# EAGLE board watch2 (EAGLE 5.06)

Size 161.29 x 99.06 mm. Coordinates in mm from the lower left corner, seen from the top.
Outline: 0,99.06 161.29,99.06 161.29,0 0,0 0,99.06
Outline: circle at 52.07,46.99 radius 24.13
Outline: circle at 52.07,46.99 radius 22.23
Outline: circle at 52.11,46.92 radius 20.32
Copper layers (1*16): Top 0.035mm / dielectric 1.5mm / Bottom 0.035mm
Design rules "default": minimum track width 10mil, minimum drill 24mil, track to track 8mil, track to pad 8mil, pad to pad 8mil, via to via 8mil, smd to smd 8mil, copper to edge 40mil, drill to drill 8mil, minimum pad ring 10mil, minimum via ring 8mil, stop-mask expansion 4mil, vias tented up to drill 0mil, thermal gap 10mil
Net classes: 0 default: width 0.356 mm

## Footprints (pad centres in the part's own frame; a part is rotated, then mirrored left to right if it is on the bottom)
0805 = smd 0.8 x 1.2: 1 -0.9,0; 2 0.9,0
HC49UP = smd 5.334 x 1.93: 1 -4.826,0; 2 4.826,0
TQFP32-08 = smd 1.27 x 0.559: 1 -4.293,2.8; 2 -4.293,2; 3 -4.293,1.2; 4 -4.293,0.4; 5 -4.293,-0.4; 6 -4.293,-1.2; 7 -4.293,-2; 8 -4.293,-2.8; 17 4.293,-2.8; 18 4.293,-2; 19 4.293,-1.2; 20 4.293,-0.4; 21 4.293,0.4; 22 4.293,1.2; 23 4.293,2; 24 4.293,2.8 | smd 0.559 x 1.27: 9 -2.8,-4.293; 10 -2,-4.293; 11 -1.2,-4.293; 12 -0.4,-4.293; 13 0.4,-4.293; 14 1.2,-4.293; 15 2,-4.293; 16 2.8,-4.293; 25 2.8,4.293; 26 2,4.293; 27 1.2,4.293; 28 0.4,4.293; 29 -0.4,4.293; 30 -1.2,4.293; 31 -2,4.293; 32 -2.8,4.293
2X3 = drill 1.016 pad 1.88 octagon: 1 0,0; 2 0,2.54; 3 2.54,0; 4 2.54,2.54; 5 5.08,0; 6 5.08,2.54
MOLEX-1X6-RA_LOCK = drill 1.016 pad 1.88 square: 1 0,0.127 | drill 1.016 pad 1.88 round: 2 2.54,-0.127; 3 5.08,0.127; 4 7.62,-0.127; 5 10.16,0.127; 6 12.7,-0.127
1X01 = drill 1.016 octagon: 1 0,0
LED-1206 = smd 1.2 x 1.4: A -1.5,0; C 1.5,0
TACTILE_SWITCH_SMD = smd 1.524 x 0.762: 1 -3.302,2.286; 2 3.302,2.286; 3 -3.302,-2.286; 4 3.302,-2.286
BUZZER-CCV = smd 3.2 x 2.5: + 4,0; - -4,0 | hole 0.8: -3.9,-2.25; 2.25,3.9
AGAIN = smd 5.08 x 6.35: + -15.24,-0.635; - 15.24,-0.635

## Placement (x,y rotation side)
C1  15pF  [0805]  45.72,67.31 0 top
C2  15pF  [0805]  57.15,67.31 0 top
C3  10uF  [0805]  59.69,36.83 0 top
C4  100nF  [0805]  59.69,39.37 0 top
C5  1.0uF  [0805]  55.88,39.37 180 top
C6  100nF  [0805]  52.07,39.37 0 top
CRYSTAL  16Mhz  [HC49UP]  52.07,62.23 0 bottom
IC1  [TQFP32-08]  52.07,46.99 0 bottom
ICSP  AVR_SPI_PRG_6PTH  [2X3]  50.8,33.02 0 top
JP1  [MOLEX-1X6-RA_LOCK]  45.72,30.48 0 top
JP2  [1X01]  68.58,52.07 0 top
JP3  [1X01]  60.96,33.02 0 top
JP4  [1X01]  43.18,33.02 0 top
JP5  [1X01]  35.56,52.07 0 top
LED1  [LED-1206]  52.07,69.22 0 top
LED2  [LED-1206]  63.14,66.27 330 top
LED3  [LED-1206]  71.33,58.12 300 top
LED4  [LED-1206]  72.42,47 270 top
LED5  [LED-1206]  71.34,35.92 240 top
LED6  [LED-1206]  62.27,29.32 210 top
LED7  [LED-1206]  52.07,24.77 180 top
LED8  [LED-1206]  40.91,27.75 150 top
LED9  [LED-1206]  32.81,35.87 120 top
LED10  [LED-1206]  29.84,46.99 90 top
LED11  [LED-1206]  32.85,58.14 60 top
LED12  [LED-1206]  40.95,66.24 30 top
LED13  [LED-1206]  52.07,67.24 0 top
LED14  [LED-1206]  62.18,64.6 330 top
LED15  [LED-1206]  69.65,57.14 300 top
LED16  [LED-1206]  74.29,47 270 top
LED17  [LED-1206]  69.75,36.84 240 top
LED18  [LED-1206]  63.18,27.74 210 top
LED19  [LED-1206]  52.07,26.61 180 top
LED20  [LED-1206]  41.86,29.4 150 top
LED21  [LED-1206]  34.47,36.83 120 top
LED22  [LED-1206]  31.75,46.99 90 top
LED23  [LED-1206]  34.55,57.16 60 top
LED24  [LED-1206]  41.95,64.52 30 top
LED25  [LED-1206]  39.37,38.1 90 top
LED26  [LED-1206]  41.91,38.1 90 top
LED27  [LED-1206]  44.45,38.1 90 top
LED28  [LED-1206]  46.99,38.1 90 top
LED29  [LED-1206]  64.77,39.37 0 top
LED30  [LED-1206]  64.77,36.83 0 top
R1  10K  [0805]  46.99,33.02 0 top
R2  [0805]  66.04,49.53 0 top
R3  [0805]  66.04,46.99 0 top
R4  [0805]  66.04,44.45 0 top
R5  [0805]  66.04,41.91 0 top
R6  [0805]  69.85,48.26 0 top
R7  [0805]  69.85,45.72 0 top
R8  [0805]  69.85,43.18 0 top
R9  10K  [0805]  41.91,60.96 0 top
R10  10K  [0805]  52.07,52.07 180 top
R11  10K  [0805]  62.23,60.96 0 top
S1  [TACTILE_SWITCH_SMD]  62.23,55.88 0 top
S2  [TACTILE_SWITCH_SMD]  41.91,55.88 0 top
S3  [TACTILE_SWITCH_SMD]  52.07,55.88 0 top
SG1  BUZZERSMD2  [BUZZER-CCV]  52.07,46.99 180 top
U$3  AGAAIN  [AGAIN]  52.07,46.99 0 bottom

## Library data of the parts
C1-C6 CRYSTAL ICSP JP1 LED1-LED30 R1-R11 S1-S3 SG1 = sparkFun
IC1 = atmega8
JP2-JP5 = pinhead
U$3 = bre

## Nets
3.3V: C3.1 C4.1 C5.1 IC1.4 IC1.6 IC1.18 IC1.20 ICSP.2 JP1.3 R1.2 R9.2 R10.2 R11.2 U$3.+
ADC6: IC1.19
ADC7: IC1.22
C0: IC1.23 JP2.1
C1: IC1.24 JP3.1
C2: IC1.25
COL0: IC1.1 LED1.C LED2.C LED3.C LED4.C LED5.C LED6.C
COL1: IC1.2 LED7.C LED8.C LED9.C LED10.C LED11.C LED12.C
COL2: IC1.9 LED13.C LED14.C LED15.C LED16.C LED17.C LED18.C
COL3: IC1.10 LED19.C LED20.C LED21.C LED22.C LED23.C LED24.C
COL4: IC1.11 LED25.C LED26.C LED27.C LED28.C LED29.C LED30.C
D2: IC1.32 JP5.1 SG1.-
GND: C1.1 C2.1 C3.2 C4.2 C5.2 IC1.3 IC1.5 IC1.21 ICSP.6 JP1.1 JP1.2 S1.3 S1.4 S2.3 S2.4 S3.3 S3.4 SG1.+ U$3.-
MISO: IC1.16 ICSP.1 R6.1
MOSI: IC1.15 ICSP.4 R5.1
N$1: IC1.12 R2.2
N$2: IC1.13 R3.2
N$3: IC1.14 R4.2
N$5: C1.2 CRYSTAL.2 IC1.7 R8.2
N$8: IC1.28 R9.1 S2.1 S2.2
N$9: IC1.27 R10.1 S1.1 S1.2
N$10: IC1.26 R11.1 S3.1 S3.2
N$12: C6.2 JP1.6
N$23: C2.2 CRYSTAL.1 IC1.8 R8.1
PD0: IC1.30 JP1.4
PD1: IC1.31 JP1.5
RESET: C6.1 IC1.29 ICSP.5 R1.1
ROW0: LED1.A LED7.A LED13.A LED19.A LED25.A R2.1
ROW1: LED2.A LED8.A LED14.A LED20.A LED26.A R3.1
ROW2: LED3.A LED9.A LED15.A LED21.A LED27.A R4.1
ROW3: LED4.A LED10.A LED16.A LED22.A LED28.A R5.2
ROW4: LED5.A LED11.A LED17.A LED23.A LED29.A R6.2
ROW5: LED6.A LED12.A LED18.A LED24.A LED30.A R7.2
SCK: IC1.17 ICSP.3 R7.1

## Tracks (layer width: path | path; a pad name or v marks a point on that pad's centre or on a via)
3.3V  (13 unrouted)
C0  (1 unrouted)
C1  (1 unrouted)
COL0  (6 unrouted)
COL1  (6 unrouted)
COL2  (6 unrouted)
COL3  (6 unrouted)
COL4  (6 unrouted)
D2  (2 unrouted)
GND  (18 unrouted)
MISO  (2 unrouted)
MOSI  (2 unrouted)
N$1  (1 unrouted)
N$2  (1 unrouted)
N$3  (1 unrouted)
N$5  (3 unrouted)
N$8  (3 unrouted)
N$9  (3 unrouted)
N$10  (3 unrouted)
N$12  (1 unrouted)
N$23  (3 unrouted)
PD0  (1 unrouted)
PD1  (1 unrouted)
RESET  (3 unrouted)
ROW0  (5 unrouted)
ROW1  (5 unrouted)
ROW2  (5 unrouted)
ROW3  (5 unrouted)
ROW4  (5 unrouted)
ROW5  (5 unrouted)
SCK  (2 unrouted)